# Altium PCB PCB1.PcbDoc
Units mm, origin at the board's own origin, x right, y up, seen from the top; angles counter-clockwise.
Board outline 50 x 50 mm, 2 copper layers (Top Layer, Bottom Layer); 3 components, 54 nets, 72 pads, 0 vias.
Unrouted connection lines stored in the file: 14.
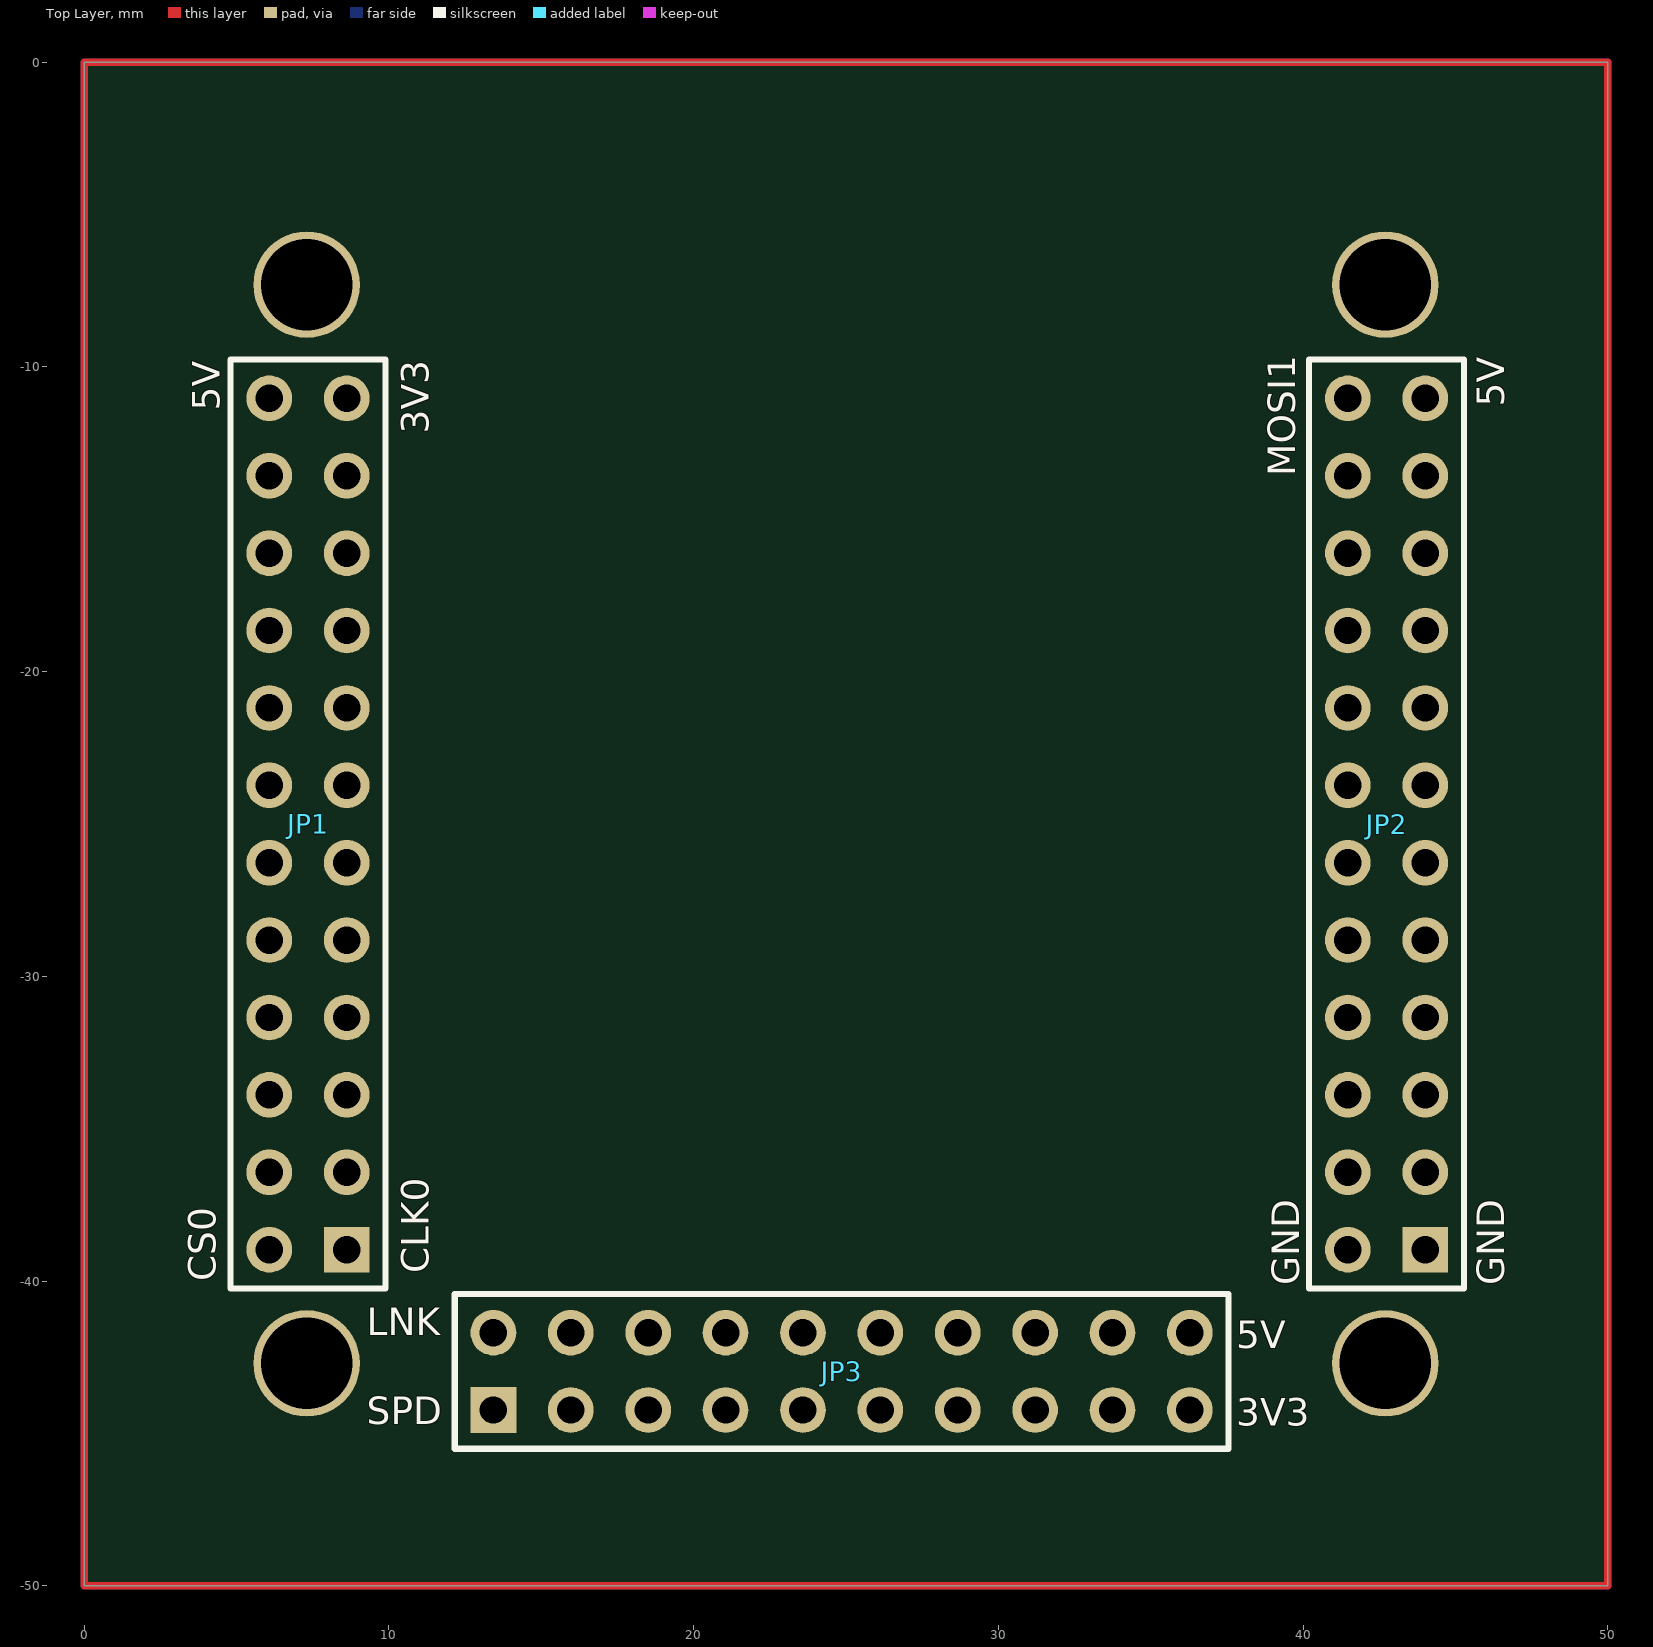
[diagram p0: Top Layer view]
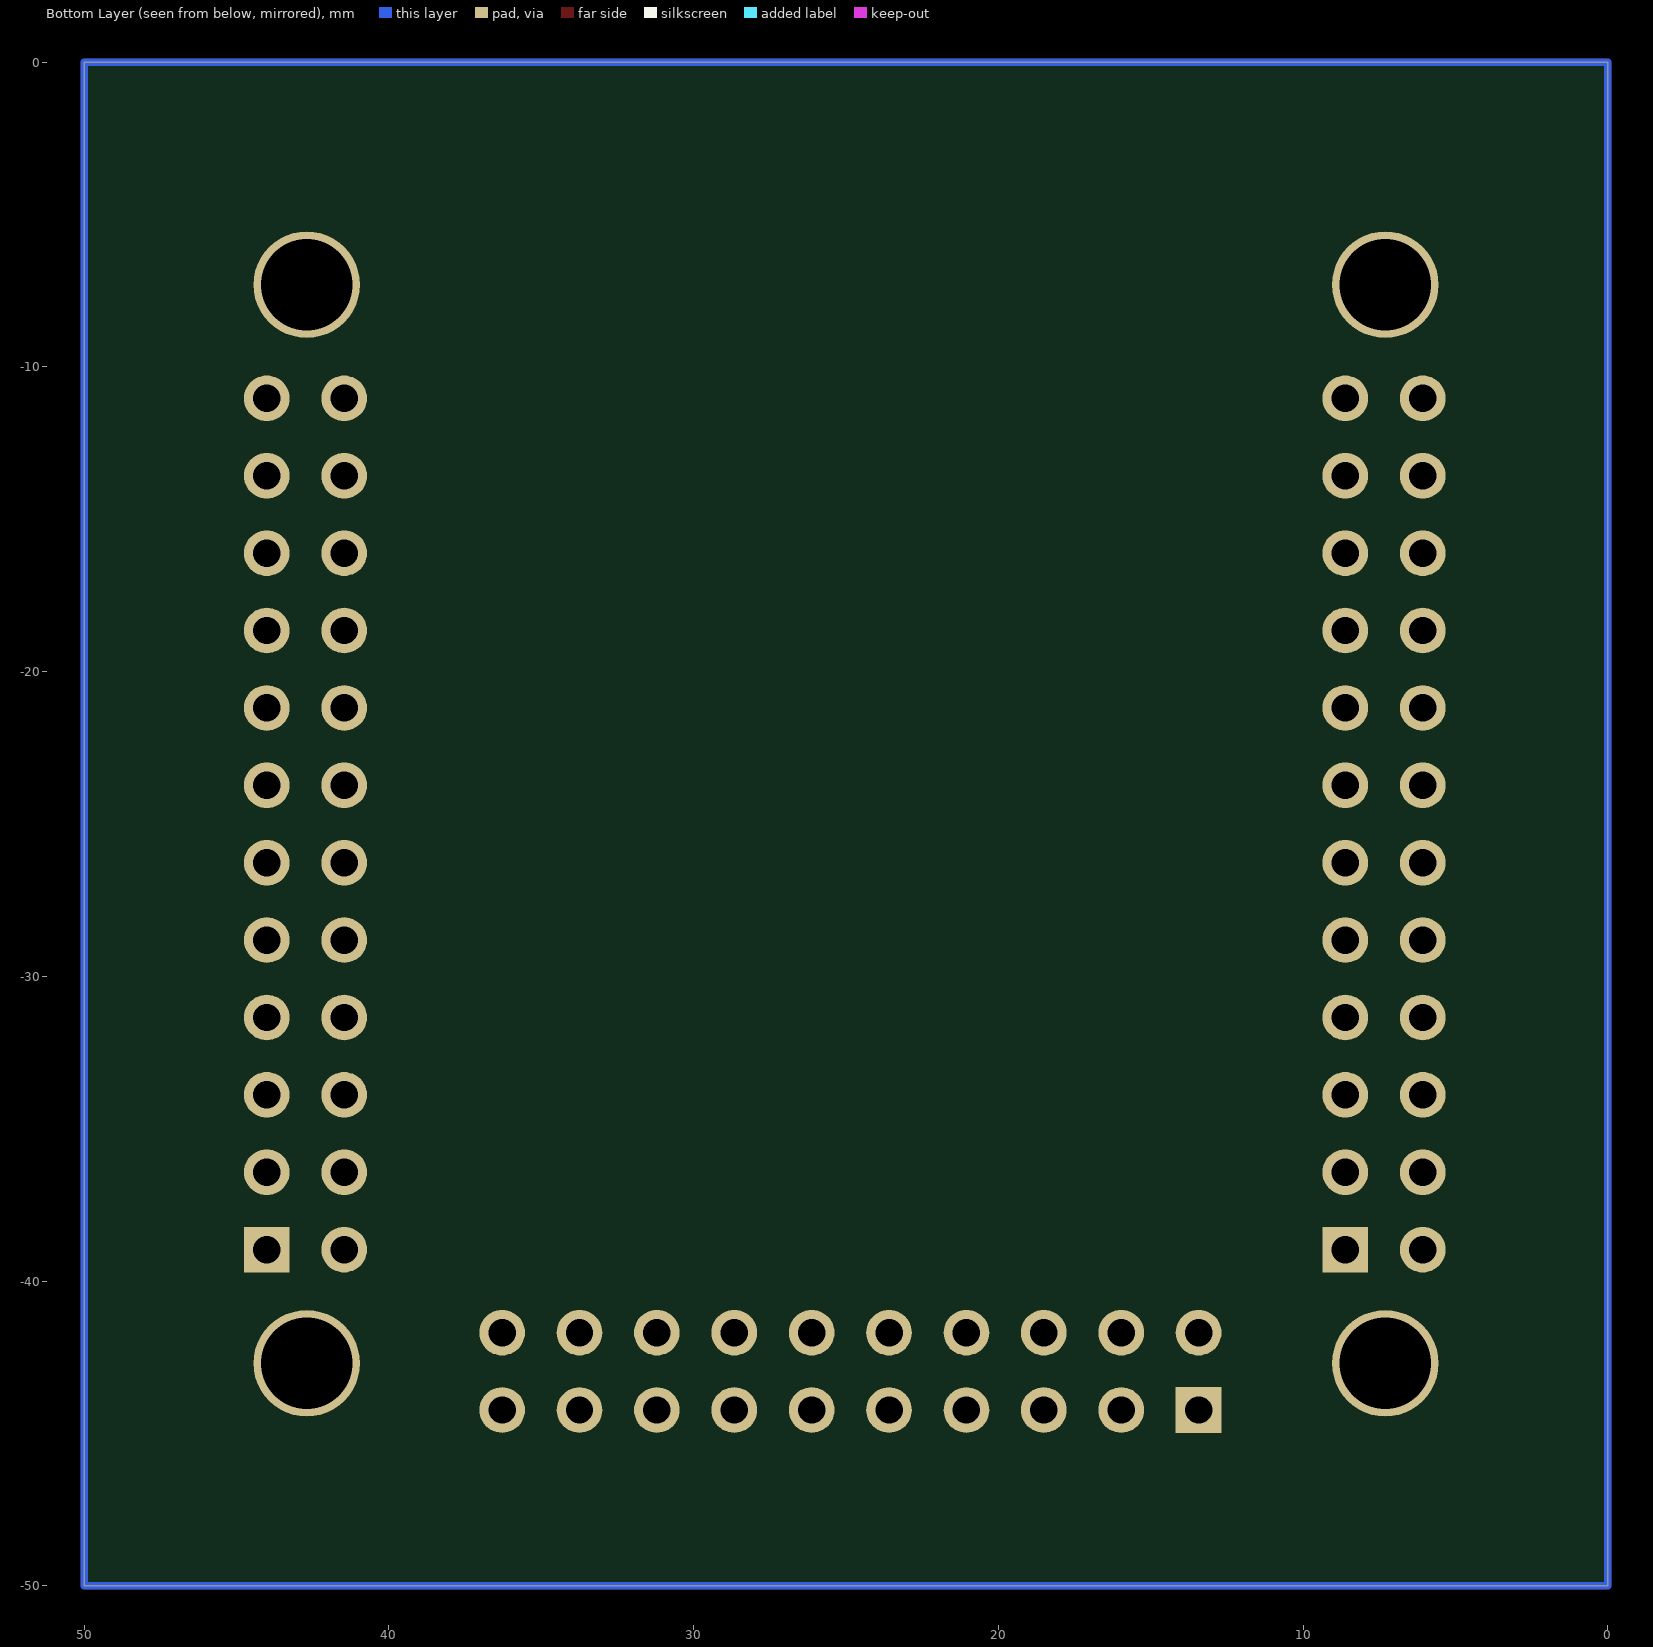
[diagram p1: Bottom Layer view, seen from below]

## Layer stack, top to bottom
Top Solder: solder mask 0.0102, Solder Resist, Dk 3.5
Top Layer: signal copper 0.0356
Dielectric 1: dielectric 0.32, FR-4, Dk 4.8
Bottom Layer: signal copper 0.0356
Bottom Solder: solder mask 0.0102, Solder Resist, Dk 3.5

## Board outline
0,-50 0,0 50,0 50,-50

## Design rules (kind name [scope] priority, off if disabled: settings)
Clearance [All] p1: gap=0.254 ignorepadtopadclearanceinfootprint=FALSE except(0: Arc-Hole Track-Hole SMDPad-Hole THPad-Hole Via-Hole Fill-Hole Poly-Hole Region-Hole Text-Hole)
PolygonConnect [All] p1: connectstyle=Relief reliefconductorwidth=0.254 reliefentries=4 polygonreliefangle="90 Angle" airgapwidth=0.254
RoomDefinition Sheet1 [InComponentClass('Sheet1')] p1: confinementstyle=ConfineIn formatcopy=TRUE lockcomponents=FALSE outline 0,-50 50,-50 50,0 0,0
RoutingVias [All] p1: holewidth=0.711 width=1.27 viastyle="Through Hole" minholewidth=0.711 minwidth=1.27 maxholewidth=0.711 maxwidth=1.27
SolderMaskExpansion [All] p1: expansion=0.102
Width [All] p1: maxlimit=0.254 minlimit=0.254 preferedwidth=0.254
30 further rules are at their usual default settings.

## Components (designator, comment, footprint, x,y, rotation, side; value= is the part's Value field where it differs from the comment)
JP1 "Header 2X11" HDR2X12 8.612,-38.97 r90 top
JP2 "Header 2X11" HDR2X12 44.012,-38.97 r90 top
JP3 "Header 2X10" HDR2X10 13.427,-44.235 r0 top

## Footprints (in the part's own frame and the unit in brackets; to place one, negate y for a bottom-side part, rotate by r counter-clockwise, add the part's x,y. Pads: shape width x height; smd on the part's side, far side on the other; paste and mask are expansions set on the pad)
HDR2X10 [mm] "Connector; Header; 10x2 Position"
  rect 1.5x1.5 hole 0.9: 1(0,0)
  round 1.5 hole 0.9: 2(0,2.54) 3(2.54,0) 4(2.54,2.54) 5(5.08,0) 6(5.08,2.54) 7(7.62,0) 8(7.62,2.54) 9(10.16,0) 10(10.16,2.54) 11(12.7,0) 12(12.7,2.54) 13(15.24,0) 14(15.24,2.54) 15(17.78,0) 16(17.78,2.54) 17(20.32,0) 18(20.32,2.54) 19(22.86,0) 20(22.86,2.54)
  silkscreen extent -1.27,-1.27 24.13,3.81
HDR2X12 [mm] "Connector; Header; 12x2 Position"
  rect 1.5x1.5 hole 0.9: 1(0,0)
  round 1.5 hole 0.9: 2(0,2.54) 3(2.54,0) 4(2.54,2.54) 5(5.08,0) 6(5.08,2.54) 7(7.62,0) 8(7.62,2.54) 9(10.16,0) 10(10.16,2.54) 11(12.7,0) 12(12.7,2.54) 13(15.24,0) 14(15.24,2.54) 15(17.78,0) 16(17.78,2.54) 17(20.32,0) 18(20.32,2.54) 19(22.86,0) 20(22.86,2.54) 21(25.4,0) 22(25.4,2.54) 23(27.94,0) 24(27.94,2.54)
  silkscreen extent -1.27,-1.27 29.21,3.81

## Part data
JP1 JP2: library part "Header 12X2", "12*2P接插件", BOM名称=12*2P接插件, 学习资源=www.ooocke.com, 版权归属=源创客
JP3: library part "Header 10X2", "10*2P接插件", BOM名称=10*2P接插件, 学习资源=www.ooocke.com, 版权归属=源创客

## Free pads (board coordinates)
  round 3.5 hole 3: 1(7.3,-7.3) 2(42.7,-7.3) 3(42.7,-42.7) 4(7.3,-42.7)

## Nets (pads, with @x,y where several pads share a name; then routed paths per layer and width w, separated by ;. In a path a pad name is that pad's centre, name@x,y a point inside that pad or via, vN(x,y) a via of type N, cw(c..) or ccw(c..) an arc to the next point about the centre after c; other vN are vias at no path point)
3V3: JP1.7 JP1.23 JP3.19
5V: JP1.22 JP1.24 JP2.4 JP2.23 JP3.18 JP3.20
-D1: JP3.3
-D2: JP3.5
-D3: JP3.7
-D4: JP3.9
BCK: JP2.7
CLK0: JP1.1
CLK1: JP2.20
CS0: JP1.2
CS1: JP2.18
D1+: JP3.4
D2+: JP3.6
D3+: JP3.8
D4+: JP3.10
DM1: JP2.19
DM2: JP2.15
DM3: JP3.16
DP1: JP2.21
DP2: JP2.17
DP3: JP3.14
GND: JP1.6 JP1.12 JP1.15 JP1.20 JP2.1 JP2.2 JP3.11 JP3.12
IOA2: JP1.11
IOA3: JP1.9
IOA6: JP1.14
IOA7: JP3.13
IOG8: JP1.10
IOG9: JP1.8
IOG11: JP1.17
IRRX: JP2.13
LL: JP2.10
LNK: JP3.2
LR: JP2.12
LRCK: JP2.9
MI0: JP1.3
MISO1: JP2.22
MN: JP2.14
MO0: JP1.5
MOSI1: JP2.24
MP: JP2.16
RX0: JP2.8
RX1: JP1.16
RX2: JP1.4
SCL0: JP1.19
SCL2: JP3.15
SDA0: JP1.21
SDA2: JP3.17
SDIN: JP2.3
SDOT: JP2.5
SPD: JP3.1
SPDF: JP2.11
TX0: JP2.6
TX1: JP1.18
TX2: JP1.13

## Other copper
Multi-Layer:
  the board outline again, w0.254

## Text inside footprints (layer, text, board x,y; h text height)
JP1: Top Overlay "CLK0" at 11.303,-39.751 h0.9 r90; Top Overlay "CS0" at 4.318,-40.005 h0.9 r90; Top Overlay "3V3" at 11.303,-12.192 h0.9 r90; Top Overlay "5V" at 4.445,-11.43 h0.9 r90
JP2: Top Overlay "GND" at 46.609,-40.132 h0.9 r90; Top Overlay "GND" at 39.878,-40.132 h0.9 r90; Top Overlay "5V" at 46.609,-11.303 h0.9 r90; Top Overlay "MOSI1" at 39.751,-13.589 h0.9 r90
JP3: Top Overlay "5V" at 37.811,-42.203 h0.9; Top Overlay "3V3" at 37.811,-44.743 h0.9; Top Overlay "SPD" at 9.271,-44.704 h0.9; Top Overlay "LNK" at 9.271,-41.783 h0.9